# Allegro board F5438A_MINI_V10B.brd
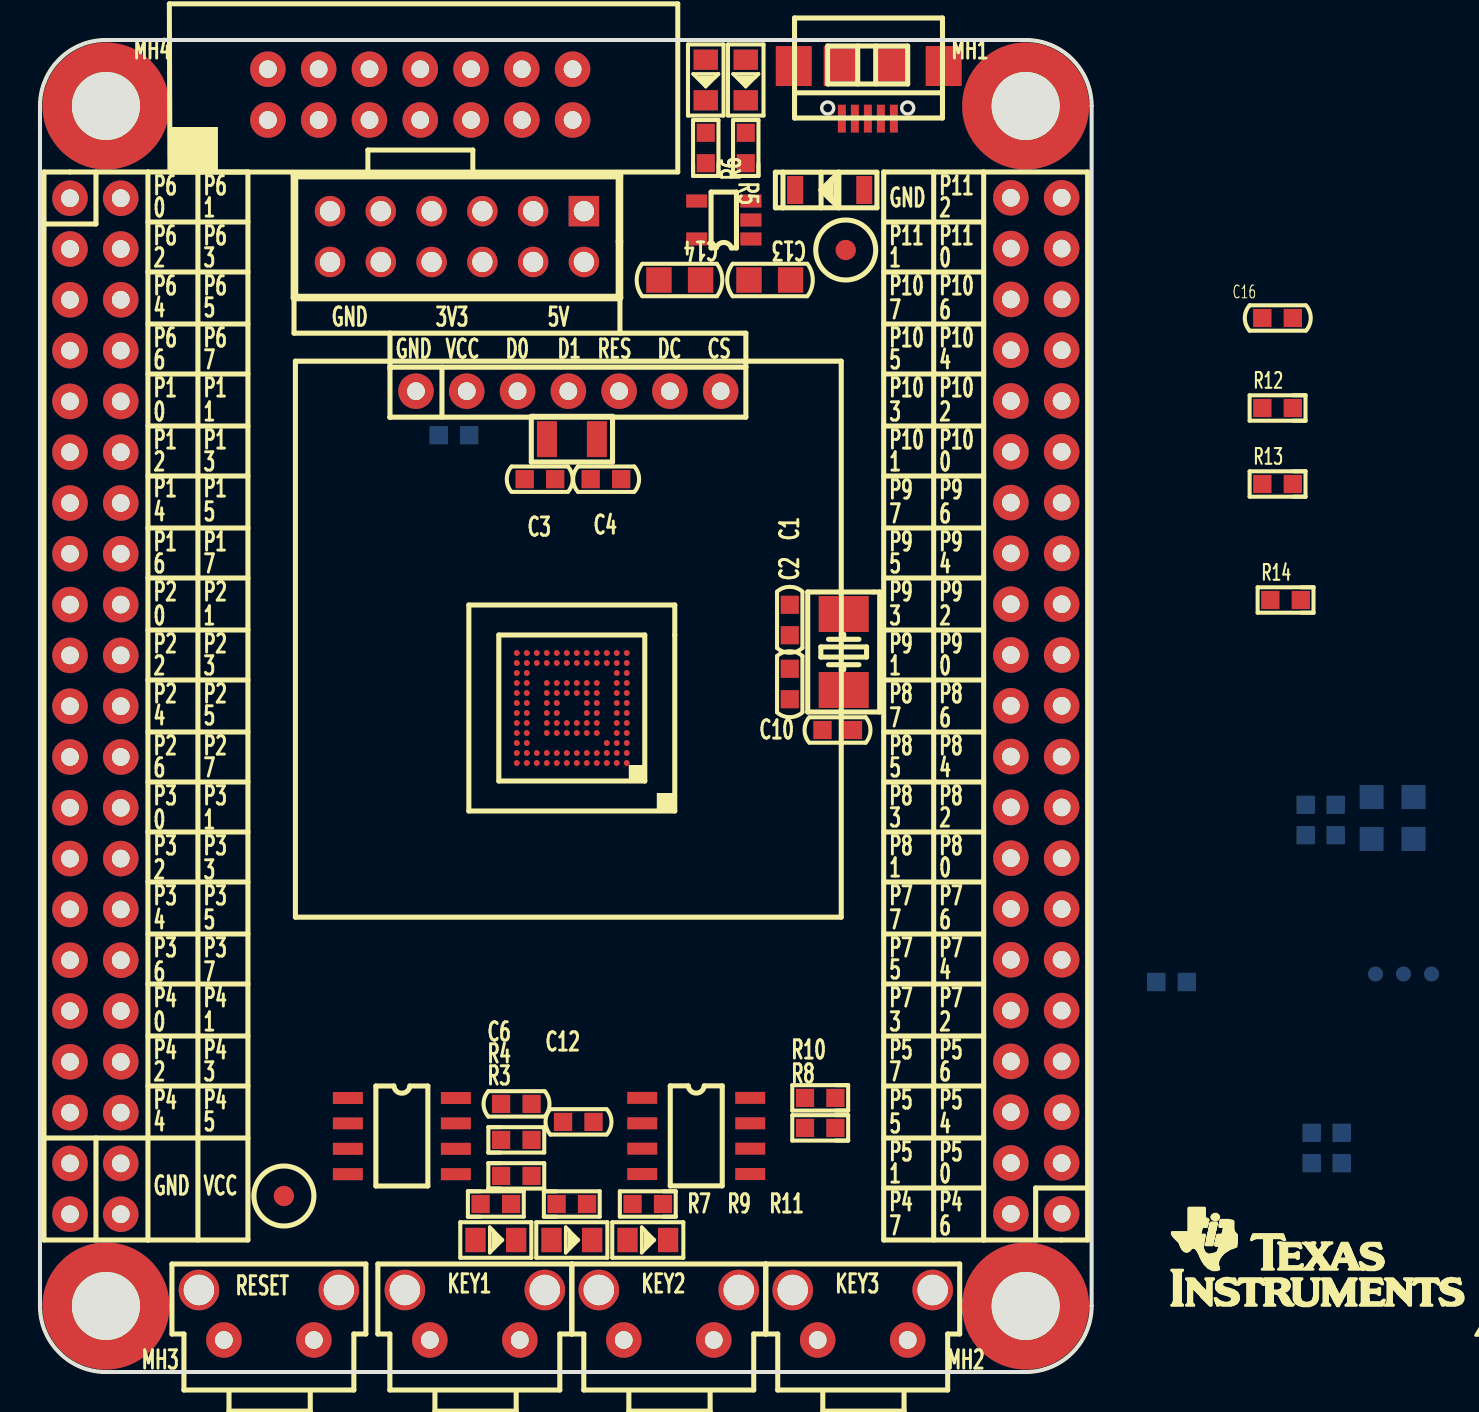
[diagram p0: board, top side]
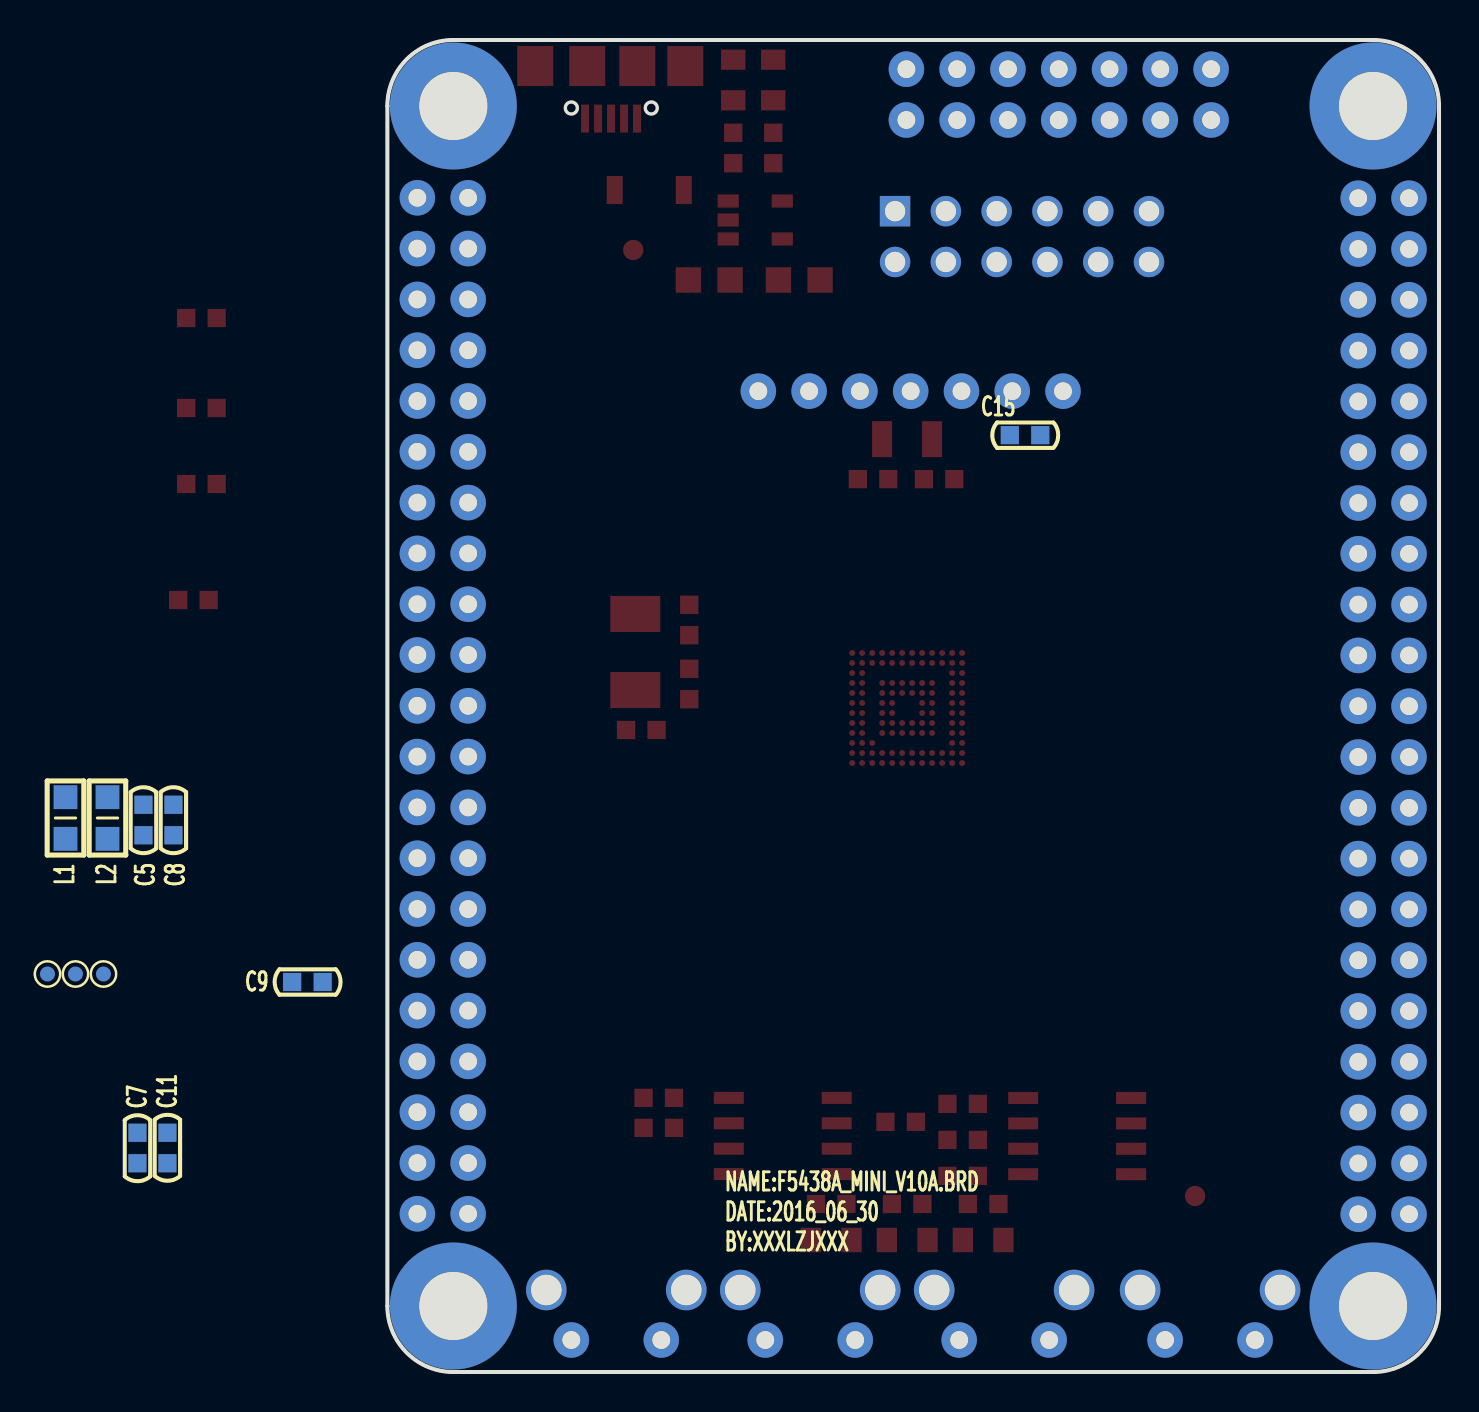
[diagram p1: board, bottom side, seen from below]

Outline 52.6 x 66.6 mm; copper layers: TOP, BOTTOM. Coordinates in mm from the lower left corner of the outline.
Outline path: 0,63.3 0,3.3 arc(0.97,0.97) 3.3,0 49.3,0 arc(51.63,0.97) 52.6,3.3 52.6,63.3 arc(51.63,65.63) 49.3,66.6 3.3,66.6 arc(0.97,65.63) 0,63.3

## Placement (name value [footprint] x y rotation side)
C1  20pF_50V  [CC0603]  37.5 37.6 90 top
C2  20pF_50V  [CC0603]  37.5 34.4 270 top
C3  12pF_50V  [CC0603]  25.01 44.64 180 top
C4  12pF_50V  [CC0603]  28.31 44.64 0 top
C5  0.1uF_50V  [CC0603]  64.8 27.6 270 bottom
C6  0.1uF_50V  [CC0603]  23.82 13.41 0 top
C7  0.1uF_50V  [CC0603]  63.6 11.2 90 bottom
C8  0.1uF_50V  [CC0603]  63.3 27.6 270 bottom
C9  0.1uF_50V  [CC0603]  56.6 19.5 180 bottom
C10  0.1uF_50V  [CC0603]  39.9 32.1 180 top
C11  0.1uF_50V  [CC0603]  65.1 11.2 270 bottom
C12  0.1uF_50V  [CC0603]  26.92 12.51 0 top
C13  10uF_25V  [CC0805]  36.5 54.6 0 top
C14  10uF_25V  [CC0805]  32 54.6 180 top
C15  0.1uF_50V  [CC0603]  20.71 46.84 180 bottom
C16  1nF_50V  [CC0603]  61.9 52.7 0 top
D1  LED_RED  [LED0805]  35.3 64.6 270 top
D2  LED_RED  [LED0805]  33.3 64.6 270 top
D3  LED_RED  [LED0805]  22.8 6.6 0 top
D4  LED_RED  [LED0805]  26.6 6.6 0 top
D5  LED_RED  [LED0805]  30.4 6.6 0 top
D6  MBR0520_SOD123  [SOD123]  41.1 59.1 180 top
J3  CONN RCPT 6X2  [HEADER6X2]  27.21 58.04 180 top
J4  CONN RCPT 21x2  [HEADER21X2-2R54]  1.5 58.7 270 top
J5  CONN RCPT 21x2  [HEADER21X2-2R54]  51.1 7.9 90 top
JP2  -  [JTAG]  11.4 62.6 0 top
L1  BEAD_BLM21PG600  [LC0805]  68.7 27.7 270 bottom
L2  BEAD_BLM21PG600  [LC0805]  66.6 27.7 270 bottom
MH1  Hold  [HOLD250D134]  49.3 63.3 0 top
MH2  Hold  [HOLD250D134]  49.3 3.3 0 top
MH3  Hold  [HOLD250D134]  3.3 3.3 0 top
MH4  Hold  [HOLD250D134]  3.3 63.3 0 top
MP1  MarkPoint  [MARKPOINT_R3]  12.2 8.8 0 top
MP2  MarkPoint  [MARKPOINT_R3]  40.3 56.1 0 top
NOREF  -  []  0 3.8 0 top
NOREF#2  -  []  3.5 0 90 top
NOREF#3  -  []  0 6.8 0 top
NOREF#4  -  []  0 4.9 0 top
NOREF#5  -  []  0 4.6 0 top
NOREF#6  -  []  4.2 0 90 top
NOREF#7  -  []  0 5 0 top
NOREF#8  -  []  4.5 0 90 top
NOREF#9  -  []  0 3.6 0 top
NOREF#10  -  []  0 5 0 top
NOREF#11  -  []  4.2 0 90 top
NOREF#12  -  []  3.9 0 90 top
R3  4.7K  [RC0603]  23.82 9.81 180 top
R4  4.7K  [RC0603]  23.82 11.61 180 top
R5  1.5K  [RC0603]  35.3 61.2 270 top
R6  1K  [RC0603]  33.3 61.2 270 top
R7  1K  [RC0603]  22.8 8.4 180 top
R8  47K  [RC0603]  39.02 12.21 0 top
R9  1K  [RC0603]  26.6 8.4 180 top
R10  0R/NI  [RC0603]  39.02 13.71 0 top
R11  1K  [RC0603]  30.4 8.4 0 top
R12  0R  [RC0603]  61.9 48.2 0 top
R13  0R/NI  [RC0603]  61.9 44.4 0 top
R14  4.7K  [RC0603]  62.3 38.6 0 top
SW1  KEY1  [SW-6X6X6-L]  19.5 1.6 0 top
SW2  KEY2  [SW-6X6X6-L]  29.2 1.6 0 top
SW3  RESET  [SW-6X6X6-L]  9.2 1.6 0 top
SW4  KEY3  [SW-6X6X6-L]  38.9 1.6 0 top
TP1  TestPoint  [TP-0R75]  69.6 19.9 180 bottom
TP2  TestPoint  [TP-0R75]  68.2 19.9 180 bottom
TP3  TestPoint  [TP-0R75]  66.8 19.9 180 bottom
U2  AT24C512  [SOIC8]  18.1 11.8 270 top
U3  SP706REN  [SOIC8]  32.82 11.81 270 top
U4  SPX3819M5-L-3-3/TR  [SOT23-5]  34.2 57.6 90 top
U5  -  [0R96-OLED-PACK]  18.81 49.04 0 top
U6  MSP430F5438AIZQW  [BGA113-MSP430F5438A]  26.6 33.2 90 top
USB1  -  [USB-MICRO]  41.4 62.6 180 top
X1  20MHz  [X-2P-5R0X3R2-SMD]  40.2 36 270 top
X2  32.768KHz  [X-2P-3R2X1R5-SMD]  26.61 46.64 0 top

## Library data of the parts
C1-C4 C6 C8-C16 = CAP NP
C5 C7 = CAP
D1-D5 = LED_4
D6 = D SCHOTTKY
J3 = CONN RCPT 6X2
J4 J5 = CONN RCPT 21x2
JP2 = JTAG
L1 L2 = INDUCTOR
MH1-MH4 = Hold_1
MP1 MP2 = MarkPoint
R3 R4 R8 R10 R14 = R_10k_1
R5-R7 R9 R11 = R_10k_0603
R12 R13 = R_Generic
SW1-SW4 = SWITCH-SPST-4P
TP1-TP3 = TestPoint
U2 = AT24C512_0
U3 = SP706T_0
U4 = SPX3819M5-L-3-3/TR
U5 = 0R96-OLED-PACK
U6 = MSP430F5438AIZQW
USB1 = USB-MICRO
X1 X2 = XTAL

## Footprints (pads in the part's own frame, mm; a bottom-side part is the same pattern mirrored in y, then rotated)
0R96-OLED-PACK
  round 1.778 hole 0.889: 1(0,0) 2(2.54,0) 3(5.08,0) 4(7.62,0) 5(10.16,0) 6(12.7,0) 7(15.24,0)
BGA113-MSP430F5438A
  round 0.3 smd: A1(-2.75,-2.75) A2(-2.25,-2.75) A3(-1.75,-2.75) A4(-1.25,-2.75) A5(-0.75,-2.75) A6(-0.25,-2.75) A7(0.25,-2.75) A8(0.75,-2.75) A9(1.25,-2.75) A10(1.75,-2.75) A11(2.25,-2.75) A12(2.75,-2.75) B1(-2.75,-2.25) B2(-2.25,-2.25) B3(-1.75,-2.25) B4(-1.25,-2.25) B5(-0.75,-2.25) B6(-0.25,-2.25) B7(0.25,-2.25) B8(0.75,-2.25) B9(1.25,-2.25) B10(1.75,-2.25) B11(2.25,-2.25) B12(2.75,-2.25) C1(-2.75,-1.75) C2(-2.25,-1.75) C3(-1.75,-1.75) C11(2.25,-1.75) C12(2.75,-1.75) D1(-2.75,-1.25) D2(-2.25,-1.25) D4(-1.25,-1.25) D5(-0.75,-1.25) D6(-0.25,-1.25) D7(0.25,-1.25) D8(0.75,-1.25) D9(1.25,-1.25) D11(2.25,-1.25) D12(2.75,-1.25) E1(-2.75,-0.75) E2(-2.25,-0.75) E4(-1.25,-0.75) E5(-0.75,-0.75) E6(-0.25,-0.75) E7(0.25,-0.75) E8(0.75,-0.75) E9(1.25,-0.75) E11(2.25,-0.75) E12(2.75,-0.75) F1(-2.75,-0.25) F2(-2.25,-0.25) F4(-1.25,-0.25) F5(-0.75,-0.25) F8(0.75,-0.25) F9(1.25,-0.25) F11(2.25,-0.25) F12(2.75,-0.25) G1(-2.75,0.25) G2(-2.25,0.25) G4(-1.25,0.25) G5(-0.75,0.25) G8(0.75,0.25) G9(1.25,0.25) G11(2.25,0.25) G12(2.75,0.25) H1(-2.75,0.75) H2(-2.25,0.75) H4(-1.25,0.75) H5(-0.75,0.75) H6(-0.25,0.75) H7(0.25,0.75) H8(0.75,0.75) H9(1.25,0.75) H11(2.25,0.75) H12(2.75,0.75) J1(-2.75,1.25) J2(-2.25,1.25) J4(-1.25,1.25) J5(-0.75,1.25) J6(-0.25,1.25) J7(0.25,1.25) J8(0.75,1.25) J9(1.25,1.25) J11(2.25,1.25) J12(2.75,1.25) K1(-2.75,1.75) K2(-2.25,1.75) K11(2.25,1.75) K12(2.75,1.75) L1(-2.75,2.25) L2(-2.25,2.25) L3(-1.75,2.25) L4(-1.25,2.25) L5(-0.75,2.25) L6(-0.25,2.25) L7(0.25,2.25) L8(0.75,2.25) L9(1.25,2.25) L10(1.75,2.25) L11(2.25,2.25) L12(2.75,2.25) M1(-2.75,2.75) M2(-2.25,2.75) M3(-1.75,2.75) M4(-1.25,2.75) M5(-0.75,2.75) M6(-0.25,2.75) M7(0.25,2.75) M8(0.75,2.75) M9(1.25,2.75) M10(1.75,2.75) M11(2.25,2.75) M12(2.75,2.75)
CC0603
  rect 0.914x0.914 smd: 1(-0.762,0) 2(0.762,0)
CC0805
  rect 1.27x1.27 smd: 1(-1.041,0) 2(1.041,0)
HEADER6X2
  rect 1.524x1.524 hole 1.016: 1(0,0)
  round 1.524 hole 1.016: 2(0,2.54) 3(2.54,0) 4(2.54,2.54) 5(5.08,0) 6(5.08,2.54) 7(7.62,0) 8(7.62,2.54) 9(10.16,0) 10(10.16,2.54) 11(12.7,0) 12(12.7,2.54)
HEADER21X2-2R54
  round 1.778 hole 0.889: 1(0.01,0) 2(0.01,2.54) 3(2.55,0) 4(2.55,2.54) 5(5.09,0) 6(5.09,2.54) 7(7.63,0) 8(7.63,2.54) 9(10.17,0) 10(10.17,2.54) 11(12.71,0) 12(12.71,2.54) 13(15.25,0) 14(15.25,2.54) 15(17.79,0) 16(17.79,2.54) 17(20.33,0) 18(20.33,2.54) 19(22.87,0) 20(22.87,2.54) 21(25.41,0) 22(25.41,2.54) 23(27.95,0) 24(27.95,2.54) 25(30.49,0) 26(30.49,2.54) 27(33.03,0) 28(33.03,2.54) 29(35.57,0) 30(35.57,2.54) 31(38.11,0) 32(38.11,2.54) 33(40.65,0) 34(40.65,2.54) 35(43.19,0) 36(43.19,2.54) 37(45.73,0) 38(45.73,2.54) 39(48.27,0) 40(48.27,2.54) 41(50.81,0) 42(50.81,2.54)
HOLD250D134
  round 6.35 hole 3.404: 1(0,0)
JTAG
  round 1.778 hole 0.889: 1(0,0) 2(0,2.54) 3(2.54,0) 4(2.54,2.54) 5(5.08,0) 6(5.08,2.54) 7(7.62,0) 8(7.62,2.54) 9(10.16,0) 10(10.16,2.54) 11(12.7,0) 12(12.7,2.54) 13(15.24,0) 14(15.24,2.54)
LC0805
  rect 1.194x1.194 smd: 1(-1.041,0) 2(1.041,0)
LED0805
  rect 1.016x1.219 smd: 1(-1.016,0) 2(1.016,0)
MARKPOINT_R3
  round 1.016 smd: 1(0,0)
RC0603
  rect 0.914x0.914 smd: 1(-0.762,0) 2(0.762,0)
SOD123
  rect 0.8x1.4 smd: 1(-0.127,0) 2(3.327,0)
SOIC8
  rect 0.6x1.5 smd: 1(-1.9,-2.7) 2(-0.63,-2.7) 3(0.64,-2.7) 4(1.91,-2.7) 5(1.91,2.7) 6(0.64,2.7) 7(-0.63,2.7) 8(-1.9,2.7)
SOT23-5
  rect 0.65x1.06 smd: 1(-0.95,-1.354) 2(0,-1.354) 3(0.95,-1.354) 4(0.95,1.354) 5(-0.95,1.354)
SW-6X6X6-L
  round 2.032 hole 1.524: 1(-1.25,2.5) 4(5.75,2.5)
  round 1.778 hole 0.889: 2(0,0) 3(4.5,0)
TP-0R75
  round 0.75 smd: 1(0,0)
USB-MICRO
  rect 0.4x1.4 smd: 1(-1.31,-0.07) 2(-0.66,-0.07) 3(-0.01,-0.07) 4(0.64,-0.07) 5(1.29,-0.07)
  rect 1.8x2 smd: 6(-3.8,-2.7) 7(-1.2,-2.7) 8(1.3,-2.7) 9(3.7,-2.7)
X-2P-3R2X1R5-SMD
  rect 1x1.8 smd: 1(-1.25,0) 2(1.25,0)
X-2P-5R0X3R2-SMD
  rect 1.8x2.5 smd: 1(-1.9,0) 2(1.9,0)

## Nets
AVCC: C5.2 L1.2 U6.E2(AVCC)
AVSS: C5.1 L2.2 U6.F2(AVSS)
GND: C1.2 C2.2 C3.2 C4.2 C6.2 C7.2 C8.1 C9.1 C10.1 C11.1 C12.1 C13.1 C14.1 C15.2 C16.1 J3.9(5) J3.10(11) J3.11(6) J3.12 J4.39 J4.41 J5.42 JP2.9 L2.1 MH1.1 MH2.1 MH3.1 MH4.1 R5.2 R6.2 SW1.1 SW1.2 SW1.4 SW2.1 SW2.2 SW2.4 SW3.1 SW3.2 SW3.4 SW4.1 SW4.2 SW4.4 U2.1(A0) U2.2(A1) U2.3(A2) U2.4(GND) U3.3(GND) U4.2(GND) U5.1(GND) U6.B6(DVSS4) U6.C3(NC_1) U6.E5(NC_2) U6.E6(NC_3) U6.E7(NC_4) U6.E8(NC_5) U6.F5(NC_6) U6.F8(NC_7) U6.F12(DVSS2) U6.G2(DVSS1) U6.G5(NC_8) U6.G8(NC_9) U6.H5(NC_10) U6.H6(NC_11) U6.H7(NC_12) U6.H8(NC_13) U6.M6(DVSS3) USB1.4(ID) USB1.5(GND) USB1.6(P_2) USB1.7(P_1) USB1.8(P_3) USB1.9(P_4)
VCC_3V3: C6.1 C8.2 C9.2 C10.2 C11.2 C12.2 C14.2 C15.1 D2.1(ANODE) D3.1(ANODE) D4.1(ANODE) D5.1(ANODE) J3.5(3) J3.6(9) J3.7(4) J3.8(10) J4.40 J4.42 L1.1 R3.1 R4.1 R8.2 R12.1 R13.1 R14.1 U2.8(VCC) U3.2(VCC) U4.5(VOUT) U5.2(VCC) U6.B7(DVCC4) U6.E12(DVCC2) U6.H2(DVCC1) U6.M7(DVCC3)
VCC_5V: C13.2 D1.1(ANODE) D6.2 J3.1 J3.2(7) J3.3(2) J3.4(8) U4.1(VIN) U4.3(EN)
#RST: C16.2 JP2.11 R8.1 U3.7(R\S\T\) U6.A3(R\S\T\/NMI/SBWTDIO)
I2C_SCL: J4.27 R4.2 U2.6(SCL) U6.J6(P3.2/UCB0SOMI/UCB0SCL)
I2C_SDA: J4.26 R3.2 U2.5(SDA) U6.M5(P3.1/UCB0SIMO/UCB0SDA)
I2C_WP: J4.25 R14.2 U2.7(WP) U6.L5(P3.0/UCB0STE/UCA0CLK)
P1.0: J4.9 U6.H1(P1.0/TA0CLK/ACLK)
P1.1: J4.10 SW1.3 U6.H4(P1.1/TA0.0)
P1.2: J4.11 SW2.3 U6.J4(P1.2/TA0.1)
P1.3: J4.12 SW4.3 U6.J1(P1.3/TA0.2)
P1.4: J4.13 U3.6(WDI) U6.J2(P1.4/TA0.3)
P1.5: J4.14 U6.K1(P1.5/TA0.4)
P1.6: J4.15 U6.K2(P1.6/SMCLK)
P1.7: J4.16 U6.L1(P1.7)
P2.0: J4.17 U6.M1(P2.0/TA1CLK/MCLK)
P2.1: J4.18 U6.L2(P2.1/TA1.0)
P2.2: J4.19 U6.M2(P2.2/TA1.1)
P2.3: J4.20 U6.L3(P2.3/TA1.2)
P2.4: J4.21 U6.M3(P2.4/RTCCLK)
P2.5: J4.22 U6.L4(P2.5)
P2.6: J4.23 U6.M4(P2.6/ACLK)
P2.7: J4.24 U6.J5(P2.7/ADC12CLK/DMAE0)
P3.3: J4.28 U6.L6(P3.3/UCB0CLK/UCA0STE)
P3.4: J4.29 JP2.10 U6.L7(P3.4/UCA0TXD/UCA0SIMO)
P3.5: J4.30 JP2.6 U6.J7(P3.5/UCA0RXD/UCA0SOMI)
P3.6: J4.31 U6.M8(P3.6/UCB1STE/UCA1CLK)
P3.7: J4.32 U6.L8(P3.7/UCB1SIMO/UCB1SDA)
P4.0: J4.33 U6.J8(P4.0/TB0.0)
P4.1: J4.34 U6.M9(P4.1/TB0.1)
P4.2: J4.35 U6.L9(P4.2/TB0.2)
P4.3: J4.36 U6.L10(P4.3/TB0.3)
P4.4: J4.37 U6.M10(P4.4/TB0.4)
P4.5: J4.38 U6.L11(P4.5/TB0.5)
P4.6: J5.1 U6.M11(P4.6/TB0.6)
P4.7: J5.2 U6.M12(P4.7/TB0CLK/SMCLK)
P5.0: J5.3 U6.D1(P5.0/A8/VREF+/VEREF+)
P5.1: J5.4 U6.E1(P5.1/A9/VREF-/VEREF-)
P5.2: C2.1 U6.A6(P5.2/XT2IN) X1.2
P5.3: C1.1 U6.A5(P5.3/XT2OUT) X1.1
P5.4: J5.5 U6.L12(P5.4/UCB1SOMI/UCB1SCL)
P5.5: J5.6 U6.J9(P5.5/UCB1CLK/UCA1STE)
P5.6: J5.7 U6.K11(P5.6/UCA1TXD/UCA1SIMO)
P5.7: J5.8 U6.K12(P5.7/UCA1RXD/UCA1SOMI)
P6.0: J4.1 U6.D4(P6.0/A0)
P6.1: J4.2 U6.B3(P6.1/A1)
P6.2: J4.3 U6.A2(P6.2/A2)
P6.3: J4.4 U6.B2(P6.3/A3)
P6.4: J4.5 U6.A1(P6.4/A4)
P6.5: J4.6 U6.E4(P6.5/A5)
P6.6: J4.7 U6.B1(P6.6/A6)
P6.7: J4.8 U6.C2(P6.7/A7)
P7.0: C4.1 U6.F1(P7.0/XTIN) X2.2
P7.1: C3.1 U6.G1(P7.1/XTOUT) X2.1
P7.2: J5.9 U6.J11(P7.2/TB0OUTH/SVMOUT)
P7.3: J5.10 U6.J12(P7.3/TA1.2)
P7.4: J5.11 U6.F4(P7.4/A12)
P7.5: J5.12 U6.C1(P7.5/A13)
P7.6: J5.13 U6.D2(P7.6/A14)
P7.7: J5.14 U6.G4(P7.7/A15)
P8.0: J5.15 U5.7(CS) U6.H9(P8.0/TA0.0)
P8.1: J5.16 U5.6(DC) U6.H11(P8.1/TA0.1)
P8.2: J5.17 U5.5(RES) U6.H12(P8.2/TA0.2)
P8.3: J5.18 U5.4(D1) U6.G9(P8.3/TA0.3)
P8.4: J5.19 U5.3(D0) U6.G11(P8.4/TA0.4)
P8.5: J5.20 U6.F11(P8.5/TA1.0)
P8.6: J5.21 U6.E11(P8.6/TA1.1)
P8.7: J5.22 U6.D12(P8.7)
P9.0: J5.23 U6.D11(P9.0/UCB2STE/UCA2CLK)
P9.1: J5.24 U6.F9(P9.1/UCB2SIMO/UCB2SDA)
P9.2: J5.25 U6.C12(P9.2/UCB2SOMI/UCB2SCL)
P9.3: J5.26 U6.E9(P9.3/UCB2CLK/UCA2STE)
P9.4: J5.27 U6.C11(P9.4/UCA2TXD/UCA2SIMO)
P9.5: J5.28 U6.B12(P9.5/UCA2RXD/UCA2SOMI)
P9.6: J5.29 U6.B11(P9.6)
P9.7: J5.30 U6.A12(P9.7)
P10.0: J5.31 U6.D9(P10.0/UCB3STE/UCA3CLK)
P10.1: J5.32 U6.A11(P10.1/UCB3SIMO/UCB3SDA)
P10.2: J5.33 U6.D8(P10.2/UCB3SOMI/UCB3SCL)
P10.3: J5.34 U6.B10(P10.3/UCB3CLK/UCA3STE)
P10.4: J5.35 U6.A10(P10.4/UCA3TXD/UCA3SIMO)
P10.5: J5.36 U6.B9(P10.5/UCA3RXD/UCA3SOMI)
P10.6: J5.37 U6.A9(P10.6)
P10.7: J5.38 U6.B8(P10.7)
P11.0: J5.39 R7.2 TP1.1 U6.A8(P11.0/ACLK)
P11.1: J5.40 R9.2 TP2.1 U6.D7(P11.1/MCLK)
P11.2: J5.41 R11.2 TP3.1 U6.A7(P11.2/SMCLK)
TCK: U6.B4(PJ.3/TCK)
TDI: U6.A4(PJ.1/TDI/TCLK)
TDO: U6.B5(PJ.0/TDO)
TEST: JP2.8 U6.D6(TEST/SBWTCK)
TMS: U6.D5(PJ.2/TMS)
N11833384: R10.1 U3.8(W\D\O\)
N11833446: R10.2 SW3.3 U3.1(M\R\)
N12438988: D6.1 USB1.1(VBUS)
N12470553: C7.1 U6.G12(VCORE)
N16725425: JP2.4 R13.2
N16725429: JP2.2 R12.2
N118360131: D2.2(CATHODE) R6.1
N118360631: D3.2(CATHODE) R7.1
N118361011: D4.2(CATHODE) R9.1
N118361391: D5.2(CATHODE) R11.1
N124401661: D1.2(CATHODE) R5.1

Pads without a net: JP2 1 3 5 7 12 13 14; MP1 1; MP2 1; U3 4 5; U4 4; USB1 2 3

## Text on the board
Ref Des/Silkscreen Bottom: NAME:F5438A_MINI_V10A.BRD | DATE:2016_06_30 | BY:XXXLZJXXX
Ref Des/Silkscreen Top: P6 | 0 | 2 | 4 | 6 | P1 | P2 | P3 | P4 | GND | 1 | 3 | 5 | 7 | VCC | RESET | 3V3 | KEY1 | D0 | 5V | D1 | RES | KEY2 | DC | CS | KEY3 | P11 | P10 | P9 | P8 | P7 | P5
